# Altium PCB PIXHACK_V5_IMU_V16.PcbDoc
Units mm, origin at the board's own origin, x right, y up, seen from the top; angles counter-clockwise.
Board outline 17 x 17 mm, 4 copper layers (Top Layer, Signal Layer 1, Signal Layer 2, Bottom Layer), stack 0.951 mm thick; 36 components, 40 nets, 166 pads, 80 vias.
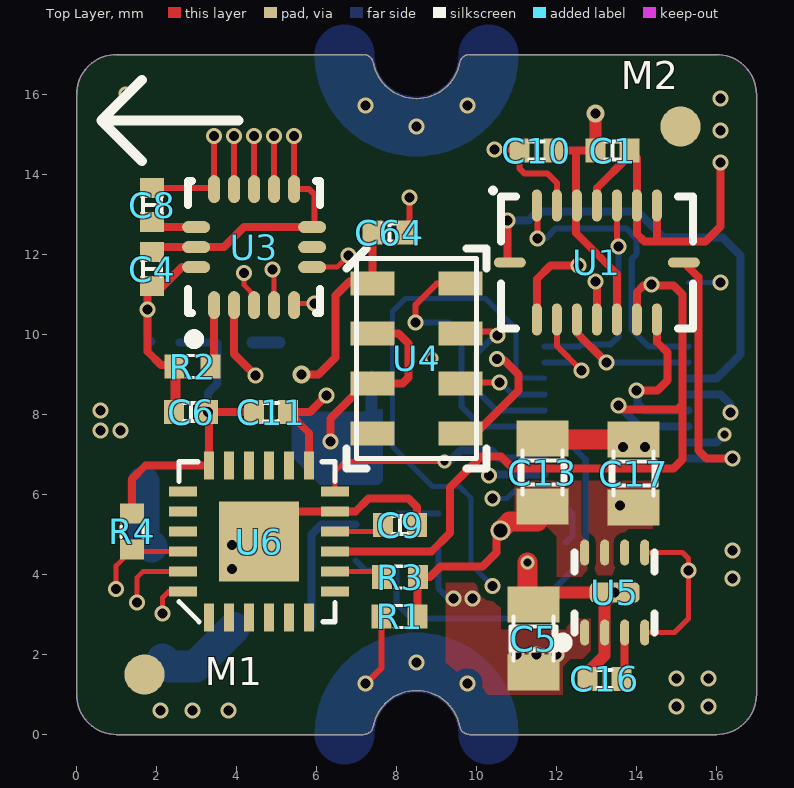
[diagram p0: Top Layer view]
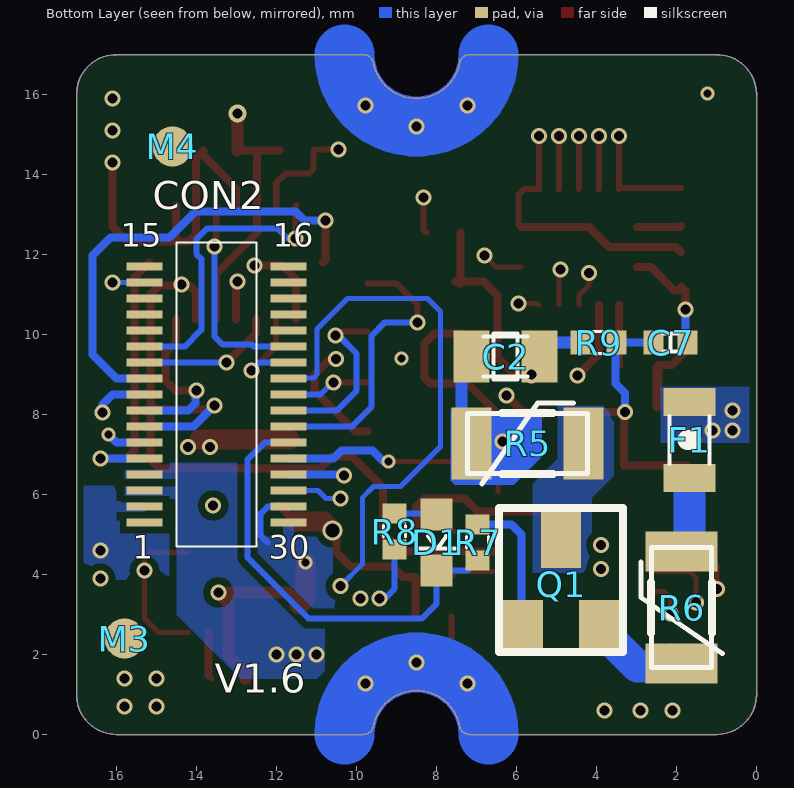
[diagram p1: Bottom Layer view, seen from below]
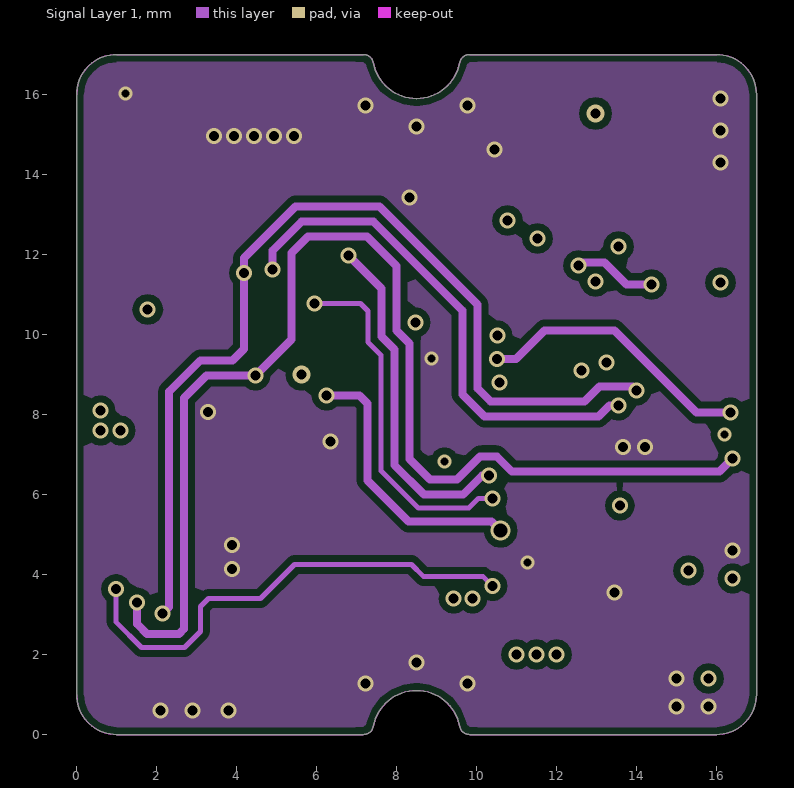
[diagram p2: Signal Layer 1]
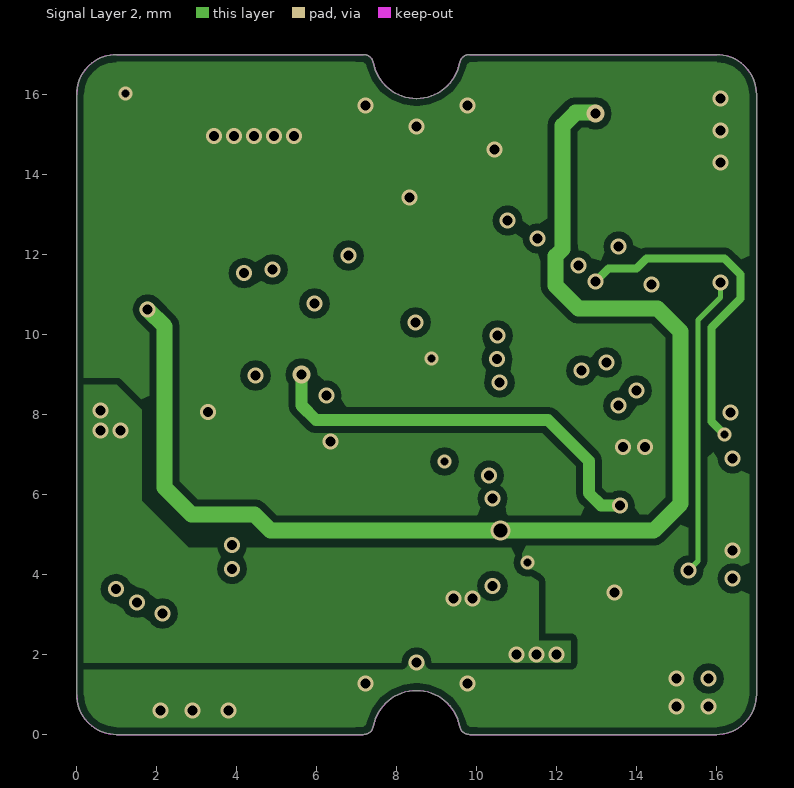
[diagram p3: Signal Layer 2]
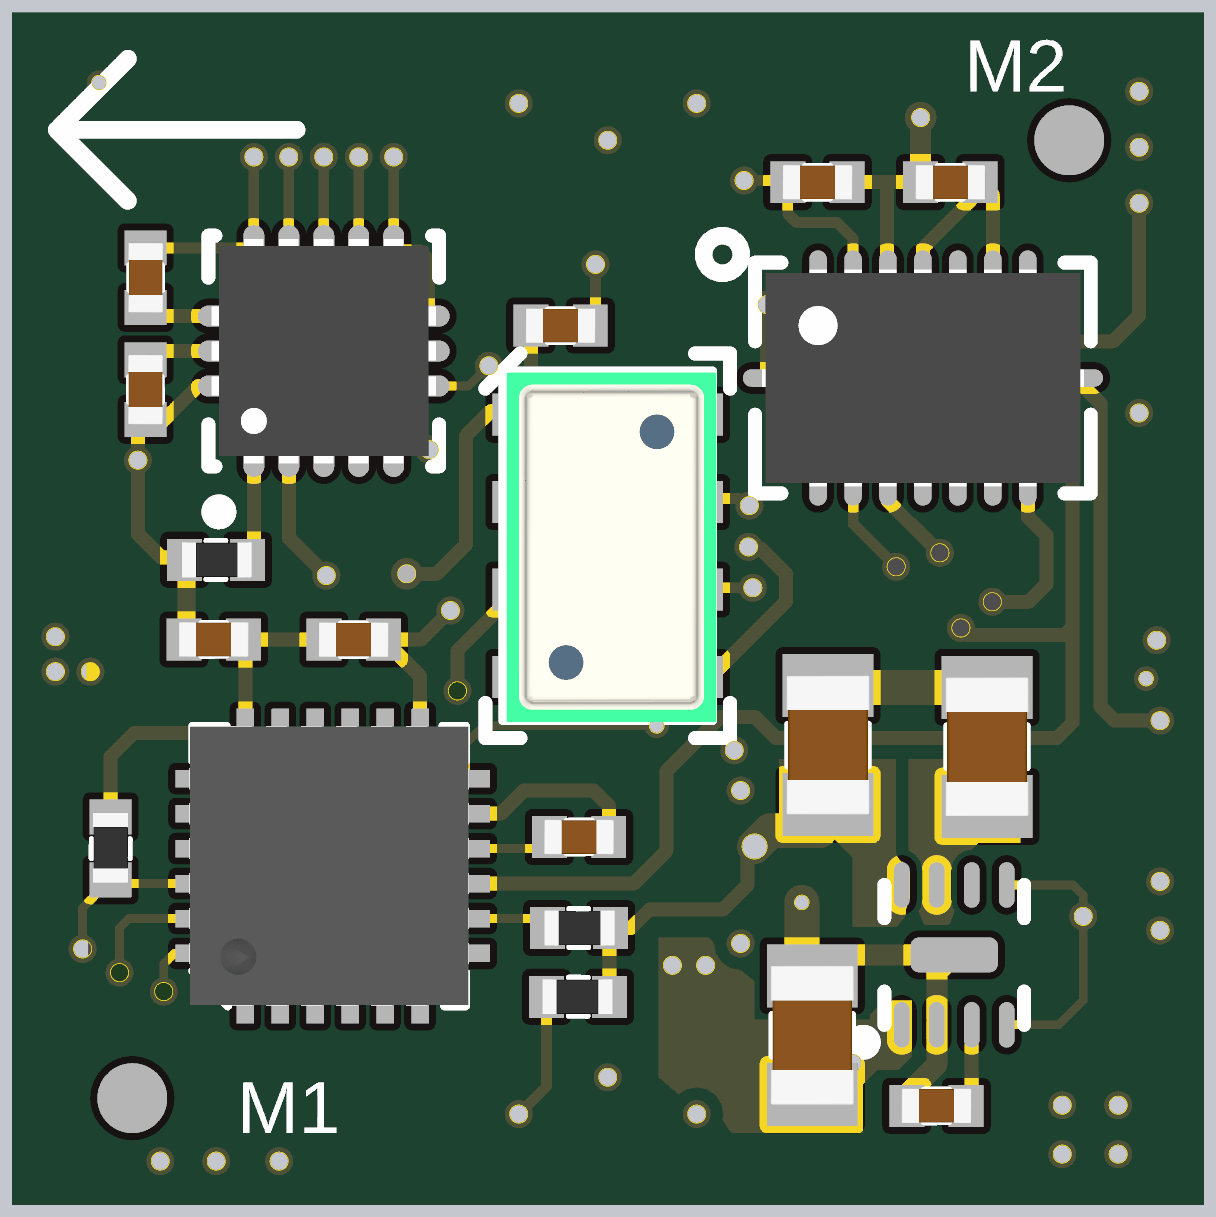
[diagram p4: 3D render of the assembled board from above, using the file's embedded part models]
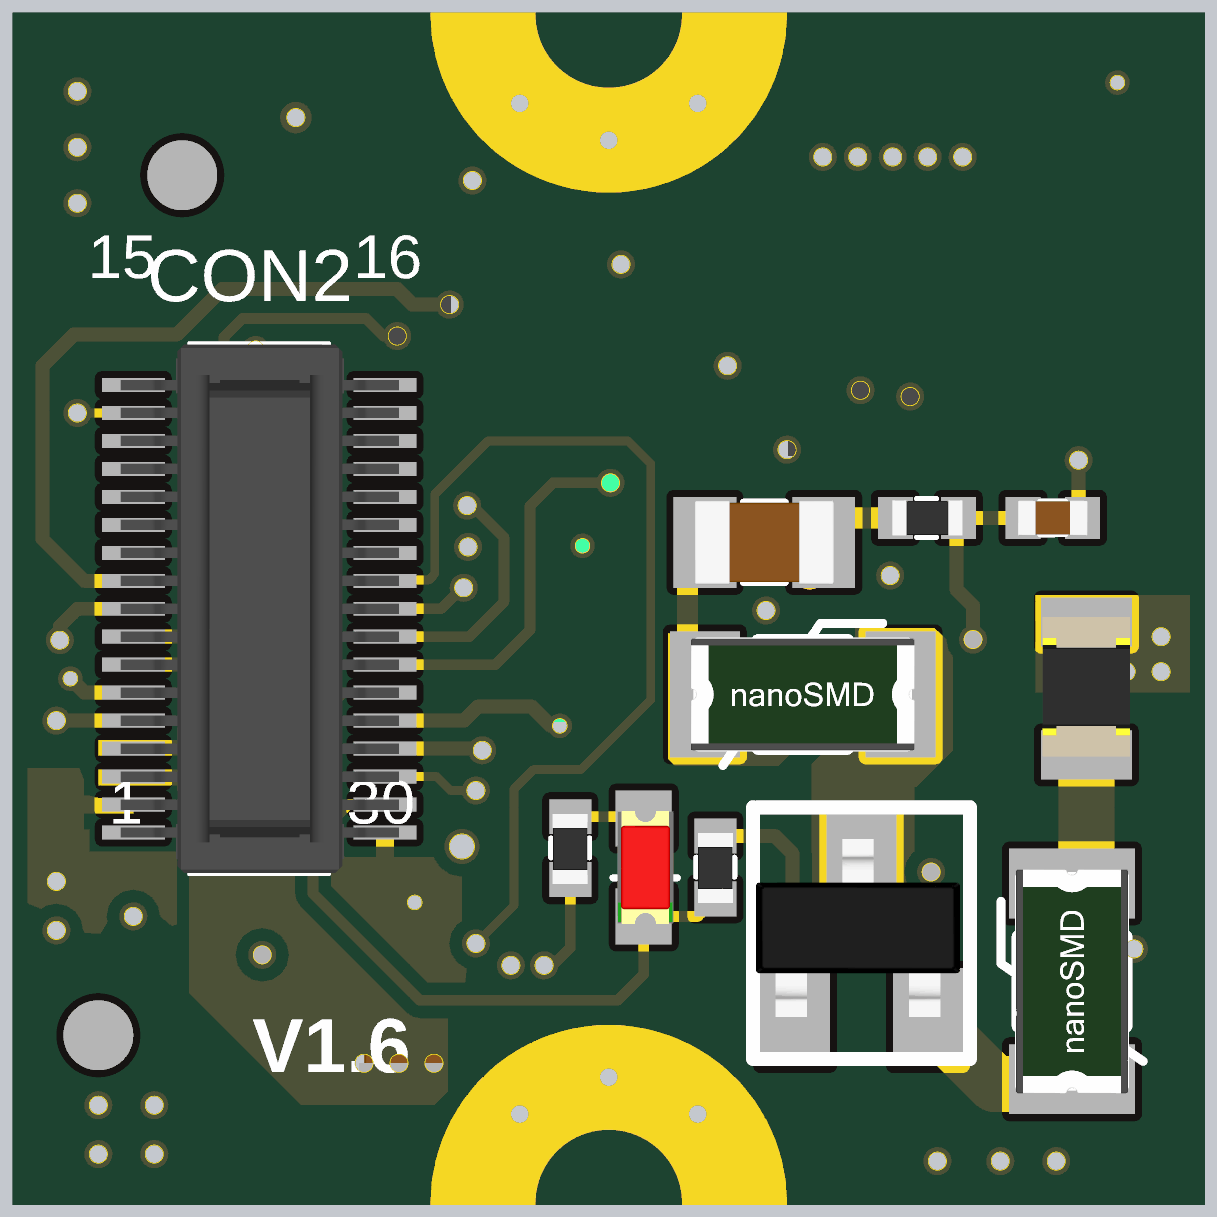
[diagram p5: 3D render of the assembled board from below, using the file's embedded part models]

## Layer stack, top to bottom
Top Solder: solder mask 0.0102, Solder Resist, Dk 3.5
Top Layer: signal copper 0.0356
Dielectric 1: core 0.254, FR-4, Dk 4.2
Signal Layer 1: signal copper 0.036
Dielectric 3: prepreg 0.3, Dk 4.2
Signal Layer 2: signal copper 0.036
Dielectric 2: core 0.254, Dk 4.2
Bottom Layer: signal copper 0.0356
Bottom Solder: solder mask 0.0102, Solder Resist, Dk 3.5

## Board outline
1,0 7.173,0 ccw(c7.173,0.25) 7.419,0.204 cw(c8.5,0) 9.581,0.204 ccw(c9.827,0.25) 9.827,0 16,0 ccw(c16,1) 17,1 17,16 ccw(c16,16) 16,17 9.827,17 ccw(c9.827,16.75) 9.581,16.796 cw(c8.5,17) 7.419,16.796 ccw(c7.173,16.75) 7.173,17 1,17 ccw(c1,16) 0,16 0,1 ccw(c1,1)

## Design rules (kind name [scope] priority, off if disabled: settings)
Clearance [All] p1: gap=0.175
PlaneConnect [All] p1: planeconnectstyle=Direct reliefexpansion=0.508 reliefentries=4 reliefconductorwidth=0.254 reliefairgap=0.254
PolygonConnect [InNet('IMU1_3V3')+InNet('IMU2_3V3')+InNet('VDD_5V_IN_IMU')+InNet('VCC')        +InNet('NetQ1_3')    +OnMultiLayer] p1: connectstyle=Direct reliefconductorwidth=0.254 reliefentries=4 polygonreliefangle="90 Angle" airgapwidth=0.254
PolygonConnect PolygonConnect_1 [All] p2: connectstyle=Relief reliefconductorwidth=0.254 reliefentries=4 polygonreliefangle="90 Angle" airgapwidth=0.254
RoomDefinition 04_POWER_LDO [InComponentClass('04_POWER_LDO')] p1: confinementstyle=ConfineIn formatcopy=TRUE lockcomponents=FALSE outline 18.155,28.315 39.364,28.315 39.364,33.268 18.155,33.268
RoomDefinition 03_constant_temp [InComponentClass('03_constant_temp')] p2: confinementstyle=ConfineIn formatcopy=TRUE lockcomponents=FALSE outline 18.155,21.203 39.491,21.203 39.491,26.918 18.155,26.918
RoomDefinition 02_IMU [InComponentClass('02_IMU')] p3: confinementstyle=ConfineIn formatcopy=TRUE lockcomponents=FALSE outline 18.155,13.71 82.544,13.71 82.544,20.06 18.155,20.06
RoomDefinition 01_interface [InComponentClass('01_interface')] p4: confinementstyle=ConfineIn formatcopy=TRUE lockcomponents=FALSE outline 18.155,1.518 24.251,1.518 24.251,12.44 18.155,12.44
RoutingVias [All] p1: holewidth=0.711 width=1.27 viastyle="Through Hole" minholewidth=0.711 minwidth=1.27 maxholewidth=0.711 maxwidth=1.27
SolderMaskExpansion [All] p1: expansion=0.102
Width [All] p1: maxlimit=1 minlimit=0.1 preferedwidth=0.125 minimp=50.000000 maximp=50.000000 favimp=50.000000
29 further rules are at their usual default settings.

## Classes and differential pairs
component class 01_interface: CON2 M1 M2 M3 M4
component class 02_IMU: C1 C2 C4 C6 C7 C8 C9 C10 C11 C64 R2 R3 R4 U1 U3 U4 U6
component class 03_constant_temp: D1 F1 Q1 R5 R6 R7 R8
component class 04_POWER_LDO: C5 C13 C16 C17 R1 R9 U5

## Components (designator, comment, footprint, x,y, rotation, side; value= is the part's Value field where it differs from the comment)
C1 "100NF" 0402C 13.4,14.6 r180 top
C2 "47uf/16V" 0805CAP 6.275,9.425 r0 bottom
C4 "100NF" 0402C 1.89,11.635 r90 top
C5 "47uf/16V" 0805CAP 11.4,2.4 r90 top
C6 "0402C220NF" 0402C 2.865,8.06 r0 top
C7 "0402C2.2UF" 0402C 2.15,9.8 r0 bottom
C8 "100NF" 0402C 1.89,13.235 r270 top
C9 "470NF" 0402C 8.09,5.235 r0 top
C10 "0402C220NF" 0402C 11.5,14.6 r180 top
C11 "0402C2.2UF" 0402C 4.865,8.06 r180 top
C13 "47uf/16V" 0805CAP 11.625,6.55 r90 top
C16 "100NF" 0402CAP 13.202,1.391 r180 top
C17 "47uf/16V" 0805CAP 13.9,6.525 r90 top
C64 "0402C100NF" 0402C 7.825,12.55 r180 top
CON2 "DF18D-30DP-0.4V(51)" "DF18C - 30DS-0.4V" 13.5,8.5 r270 bottom locked
D1 "0603_LED_RED" 0603-LED-RED 8,4.8 r270 bottom
F1 "10R" 0805L 1.645,7.36 r90 bottom
M1 "MARK" MARK 1.7,1.5 r0 top
M2 "MARK" MARK 15.1,15.2 r0 top
M3 "MARK" MARK 15.8,2.4 r180 bottom
M4 "MARK" MARK 14.6,14.7 r180 bottom
Q1 "MMBT3906" SOT-23 5.836,2.661 r180 bottom
R1 "4.7K" 0402R 8.075,2.95 r0 top
R2 "0402R0R" 0402R 2.9,9.2 r180 top
R3 "0402R0R" 0402R 8.09,3.935 r180 top
R4 "10K" 0402R 1.391,5.074 r270 top
R5 "47R" 1206F 5.725,7.3 r180 bottom
R6 "10R" 1206F 1.899,3.171 r90 bottom
R7 "10K" 0402r 6.975,4.8 r90 bottom
R8 "2K" 0402R 9.05,5.075 r90 bottom
R9 "4.7K" 0402R 3.95,9.8 r0 bottom
U1 "BMI055" LGA16_BMI055 13,11.8 r0 top
U3 "ICM-20602" LGA16 4.439,12.186 r90 top
U4 "ms5611" ms5611 8.525,9.35 r90 top
U5 "MIC5330-SSYML" MIC5530 13.456,3.55 r90 top
U6 "ICM-20689" QFN24 4.566,4.82 r90 top

## Footprints (in the part's own frame and the unit in brackets; to place one, negate y for a bottom-side part, rotate by r counter-clockwise, add the part's x,y. Pads: shape width x height; smd on the part's side, far side on the other; paste and mask are expansions set on the pad)
0402C [mm]
  rect 0.5x0.6 smd: 1(-0.425,0) 2(0.425,0)
  silkscreen extent -0.18,-0.23 0.17,0.23, body extent -0.5,-0.25 0.5,0.25, height 0.5
0402CAP [mm]
  rect 0.5x0.6 smd: 1(-0.425,0) 2(0.425,0)
  silkscreen extent -0.18,-0.23 0.17,0.23, body extent -0.5,-0.25 0.5,0.25, height 0.5
0402R [mm]
  rect 0.5x0.6 smd: 1(-0.45,0) 2(0.45,0)
  silkscreen extent -0.13,-0.27 0.14,0.28, body extent -0.51,-0.25 0.49,0.25, height 0.3
0402r [mm]
  rect 0.5x0.6 smd: 1(-0.45,0) 2(0.45,0)
  silkscreen extent -0.13,-0.27 0.14,0.28, body extent -0.51,-0.25 0.49,0.25, height 0.3
0603-LED-RED [mm]
  rect 0.8x0.8 smd: 1(-0.7,0) 2(0.7,0)
  silkscreen extent -0.16,-0.44 0.15,0.48, body extent -0.81,-0.37 0.81,0.43, height 0.6
0805CAP [mm]
  rect 0.9x1.3 smd: 1(-0.85,-0.025) 2(0.85,-0.025)
  silkscreen extent -0.55,-0.6 0.55,0.55, body extent -1,-0.62 1,0.58, height 1.2
0805L [mm]
  rect 0.7x1.3 smd: 1(-0.95,0.025) 2(0.95,0.025)
  silkscreen extent -0.6,-0.47 0.6,0.53, body extent -0.97,-0.6 1.03,0.65, height 0.45
1206F [mm]
  rect 1x1.8 smd: 1(-1.4,-0.025) 2(1.4,-0.025)
  silkscreen extent -1.5,-1.04 1.5,0.99, body extent -1.6,-0.83 1.6,0.77, height 1
"DF18C - 30DS-0.4V" [mm]
  rect 0.2x0.9 smd: 0(-3.2,-1.8) 0(-3.2,1.8) 0(3.2,-1.8) 1(2.8,-1.8) 2(2.4,-1.8) 3(2,-1.8) 4(1.6,-1.8) 5(1.2,-1.8) 6(0.8,-1.8) 7(0.4,-1.8) 8(0,-1.8) 9(-0.4,-1.8) 10(-0.8,-1.8) 11(-1.2,-1.8) 12(-1.6,-1.8) 13(-2,-1.8) 14(-2.4,-1.8) 15(-2.8,-1.8) 16(-2.8,1.8) 17(-2.4,1.8) 18(-2,1.8) 19(-1.6,1.8) 20(-1.2,1.8) 21(-0.8,1.8) 22(-0.4,1.8) 23(0,1.8) 24(0.4,1.8) 25(0.8,1.8) 26(1.2,1.8) 27(1.6,1.8) 28(2,1.8) 29(2.4,1.8) 30(2.8,1.8) 30(3.2,1.8) 30(3.2,1.8)
  silkscreen extent -3.8,-1 3.8,1, body extent -3.78,-1.98 3.78,2, height 1.16
LGA16 [mm]
  oval 0.7x0.3 smd: 1(-1.45,1) 2(-1.45,0.5) 3(-1.45,0) 4(-1.45,-0.5) 5(-1.45,-1) 9(1.45,-1) 10(1.45,-0.5) 11(1.45,0) 12(1.45,0.5) 13(1.45,1)
  oval 0.3x0.7 smd: 6(-0.5,-1.45) 7(0,-1.45) 8(0.5,-1.45) 14(0.5,1.45) 15(0,1.45) 16(-0.5,1.45)
  silkscreen extent -2.42,-1.65 1.65,1.65, body extent -1.61,-1.61 1.61,1.61, height 0.75
LGA16_BMI055 [mm]
  oval 0.25x0.8 smd: 1(-1.492,1.425) 2(-0.992,1.425) 3(-0.492,1.425) 4(0.008,1.425) 5(0.508,1.425) 6(1.008,1.425) 7(1.508,1.425) 9(1.508,-1.425) 10(1.008,-1.425) 11(0.508,-1.425) 12(0.008,-1.425) 13(-0.492,-1.425) 14(-0.992,-1.425) 15(-1.492,-1.425)
  oval 0.8x0.25 smd: 8(2.183,0) 16(-2.167,0)
  silkscreen extent -2.59,-1.65 2.41,1.8, body extent -2.29,-1.55 2.31,1.55, height 0.75
MARK [mm]
  round 1 smd: 1(0,0)
MIC5530 [mm] "QFN, 8-Leads, Body 2.0x2.0mm (max), Pitch 0.00mm, Pitch1 0.50mm, IPC Medium Density"
  oval 0.65x0.225 smd: 1(-1,0.75) 2(-1,0.25) 3(-1,-0.25) 4(-1,-0.75) 5(1,-0.75) 6(1,-0.25) 7(1,0.25) 8(1,0.75)
  rrect50% 0.5x1.25 smd: 2(0,0)
  silkscreen extent -1.37,-1 1,1.42, body extent -1,-1 1,1, height 0.85
ms5611 [mm]
  rect 0.6x1.1 smd: 1(1.925,1.125) 2(0.675,1.125) 3(-0.575,1.125) 4(-1.825,1.125) 5(-1.825,-1.075) 6(-0.575,-1.075) 7(0.675,-1.075) 8(1.925,-1.075)
  silkscreen extent -2.7,-1.73 2.8,1.77, body extent -2.47,-1.53 2.53,1.47, height 1
QFN24 [mm]
  rect 0.7x0.25 smd: 1(-1.9,1.25) 2(-1.9,0.75) 3(-1.9,0.25) 4(-1.9,-0.25) 5(-1.9,-0.75) 6(-1.9,-1.25) 13(1.9,-1.25) 14(1.9,-0.75) 15(1.9,-0.25) 16(1.9,0.25) 17(1.9,0.75) 18(1.9,1.25)
  rect 0.25x0.7 smd: 7(-1.25,-1.9) 8(-0.75,-1.9) 9(-0.25,-1.9) 10(0.25,-1.9) 11(0.75,-1.9) 12(1.25,-1.9) 19(1.25,1.9) 20(0.75,1.9) 21(0.25,1.9) 22(-0.25,1.9) 23(-0.75,1.9) 24(-1.25,1.9)
  rect 2x2 smd: 18(0,0)
  silkscreen extent -2,-1.9 2,2, body extent -2,-1.95 2,2.05, height 1
SOT-23 [mm]
  rect 1x1.4 smd: 1(0,0) 2(1.9,0) 3(0.95,2.2)
  silkscreen extent -0.6,-0.6 2.5,3, body extent -0.56,0 2.36,2.55, height 0.99

## Part data
C1 C4 C8: library part 0402C220NF
C2 C5 C13 C17: library part Cap, "Capacitor"
C9: library part 0402C2.2UF
C16: library part Cap
C64: "50V 5%"
F1: library part "Fuse 1", "Fuse"
R1 R9: library part 0402R1K, "0402R1K 1%"
R2 R3: "0402R0R 1%"
R4: library part 0402R0R, "0402R0R 1%"
R5 R6: library part Res2, "Resistor"
R7: library part RMCF0402FT4K99, "RES TF 4.99K OHM 1% 1/16W 0402"
R8: library part 0402R100R, "0402R100R 1%"
U5: library part MIC5530

## Via types
v1: diameter 0.4, hole 0.25, Top Layer to Bottom Layer, tented both sides, 72 vias
v2: diameter 0.35, hole 0.2, Top Layer to Bottom Layer, tented both sides, 5 vias
v3: diameter 0.45, hole 0.25, Top Layer to Bottom Layer, tented both sides, 2 vias
v4: diameter 0.5, hole 0.35, Top Layer to Bottom Layer, tented both sides, 1 vias

## Nets (pads, with @x,y where several pads share a name; then routed paths per layer and width w, separated by ;. In a path a pad name is that pad's centre, name@x,y a point inside that pad or via, vN(x,y) a via of type N, cw(c..) or ccw(c..) an arc to the next point about the centre after c; other vN are vias at no path point)
20689_VDDIO: R3.2 U6.8 | length 1.2
  Top Layer w0.125: U6.8 7.505,4.07 R3.2
CS1_ICM20689: CON2.22 R4.2 U6.22 | length 28.1
  Top Layer w0.125: v1(0.99,3.635) 0.99,4.223 R4.2 1.444,4.57 U6.22
  Signal Layer 1 w0.125: v1(0.99,3.635) 0.99,2.81 1.625,2.175 2.7,2.175 3.1,2.575 3.1,3.2 3.3,3.4 4.6,3.4 5.45,4.25 8.375,4.25 8.671,3.954 10.159,3.954 v1(10.4,3.713)
  Bottom Layer w0.125: v1(10.4,3.713) 9.857,4.257 9.857,5.918 9.575,6.2 8.9,6.2 7.9,7.2 7.9,10.575 8.225,10.9 10.225,10.9 10.988,10.137 10.988,9.006 11.013,8.981 11.013,8.971 11.071,8.912 11.688,8.912 CON2.22
CS2_ICM20602: CON2.29 U3.5 | length 10.7
  Top Layer w0.125: U3.5 5.478,10.775 v1(5.95,10.775)
  Signal Layer 1 w0.125: v1(5.95,10.775) 7.1,10.775 7.288,10.587 7.288,9.809 7.612,9.484 7.612,6.593 8.543,5.663 9.807,5.663 10.044,5.9 v1(10.4,5.9)
  Bottom Layer w0.125: v1(10.4,5.9) 10.762,5.9 10.963,6.1 CON2.29
CS3_BMI055_GYRO: CON2.20 U1.5 | length 5.2
  Top Layer w0.154: U1.5 13.508,12.242 v1(13.55,12.2)
  Bottom Layer w0.154: CON2.20 12.573,9.7 12.625,9.752 13.352,9.752 13.55,9.95 v1(13.55,12.2)
CS4_BMI055_ACC: CON2.21 U1.14 | length 2.6
  Top Layer w0.15: U1.14 12.008,9.717 v1(12.625,9.1) v1@12.675,9.1
  Bottom Layer w0.15: CON2.21 12.425,9.3 v1(12.625,9.1)
DRDY1_ICM20689: CON2.27 U6.12 | length 6
  Top Layer w0.125: U6.12 6.466,6.566 6.725,6.825 v2(9.2,6.825)
  Bottom Layer w0.2: v2(9.2,6.825) 9.325,6.825 9.6,7.1 10.372,7.1 10.572,6.9 CON2.27
DRDY2_BMI055_GYRO: CON2.5 U1.12 | length 10.4
  Top Layer w0.2: v1(12.975,11.325) 13.008,11.292 U1.12
  Signal Layer 2 w0.2: v1(12.975,11.325) 13.3,11.65 14,11.65 14.25,11.9 16.2,11.9 16.6,11.5 16.6,10.9 15.875,10.175 15.875,7.825 v2(16.2,7.5)
  Bottom Layer w0.2: CON2.5 16,7.3 v2(16.2,7.5)
DRDY3_BMI055_ACC: CON2.9 U1.16 | length 11.5
  Top Layer w0.2: v1(10.775,12.85) 10.775,11.858 U1.16
  Bottom Layer w0.2: v1(10.775,12.85) 11.303,12.85 11.528,13.075 14.025,13.075 14.675,12.425 16.15,12.425 16.6,11.975 16.6,9.5 16,8.9 CON2.9
DRDY4_ICM20602: CON2.28 U3.6 | length 11
  Top Layer w0.125: U3.6 6.511,11.686 v1(6.8,11.975)
  Signal Layer 1 w0.2: v1(6.8,11.975) 7.625,11.15 7.625,9.948 7.95,9.624 7.95,6.733 8.683,6 9.667,6 v1@10.142,6.475 ; v1@10.143,6.475 v1(10.309,6.475)
  Bottom Layer w0.2: v1(10.309,6.475) 10.307,6.475 10.301,6.482 10.309,6.491 10.3,6.5 CON2.28
DRDY5_BMI055_GYRO: CON2.10 U1.13 | length 3.4
  Top Layer w0.2: U1.13 12.508,10.042 12.608,9.942 12.608,9.934 12.842,9.7 12.85,9.7 v1(13.25,9.3)
  Bottom Layer w0.154: v1(13.25,9.3) CON2.10
DRDY6_BMI055_ACC: CON2.11 U1.1 | length 7.4
  Top Layer w0.154: U1.1 11.525,13.208 v1(11.525,12.4)
  Bottom Layer w0.154: v1(11.525,12.4) 11.725,12.4 11.977,12.652 13.737,12.652 14.002,12.387 14.002,12.013 13.879,11.89 13.879,10.121 14.3,9.7 CON2.11
GND: C1.1 C2.2 C4.2 C5.2 C6.2 C7.2 C8.1 C9.2 C10.2 C11.2 C13.2 C16.2 C17.2 C64.1 CON2.1 CON2.30 R1.1 R4.1 R5.1 R9.1 U1.2 U1.4 U1.6 U1.7 U3.8 U3.9 U3.10 U3.11 U3.12 U3.13 U3.15 U4.2 U4.3 U5.2 U6.11 U6.18 | length 68.2
  Top Layer w0.154: C8.1 3.415,13.66 U3.13 v1(3.439,14.961) v1@3.425,14.975 ; v1@3.925,14.975 v1(3.939,14.961) U3.12 ; v1@4.425,14.975 v1(4.439,14.961) U3.11 ; v1@4.925,14.975 v1(4.939,14.961) U3.10 ; v1@5.425,14.975 v1(5.439,14.961) U3.9 5.814,13.636 5.95,13.5 5.95,12.747 U3.8 ; v1(7.227,1.273) 7.625,1.671 R1.1 ; C64.1 8.325,12.625 v1(8.325,13.425) ; v1@10.525,14.625 11.05,14.625 C10.2 11.075,14.15 11.2,14.025 11.775,14.025 12.008,13.792 U1.2
  Top Layer w0.2: R4.1 1.391,6.391 1.72,6.72 3.316,6.72 3.316,8.058 3.315,8.06 C11.2 C11.2@4.465,8.06 ; C4.2 2.016,12.186 U3.15 3.686,12.186 4.186,12.686 U3.8 ; U6.18@4.566,4.82 5.316,5.57 U6.11 6.97,5.57 7.3,5.9 8.3,5.9 8.515,5.685 C9.2 ; v1(6.35,7.325) 6.35,7.903 7.222,8.775 U4.3 8.15,8.775 8.3,8.925 8.3,9.775 8.05,10.025 U4.2 ; C13.2 C13.2@11.675,7.375 ; U1.4 13.008,13.658 13.825,14.475 C1.1 14.008,14.417 U1.6 14.008,12.517 14.2,12.325 14.475,12.325 ; U1.7 14.508,12.358 14.475,12.325 ; v1(16.1,14.3) 16.1,12.7 15.725,12.325 14.475,12.325
  Top Layer w0.3: C5.2 11.725,3.55 v1(13.456,3.55) 13.206,3.3 13.206,2.55 13.206,1.979 12.777,1.55 C16.2
  Top Layer w0.5: v2(11.275,4.3) 11.275,3.4 C5.2 ; C13.2@11.675,7.375 C17.2
  Bottom Layer w0.154: CON2.30@11.7,5.7 12.225,5.7 12.4,5.525 12.4,4.975 12.225,4.8
  Bottom Layer w0.2: C7.2 R9.1 3.525,9.775 3.525,8.775 3.29,8.54 v1(3.29,8.06)
  Bottom Layer w0.3: R5.1@7.375,7.575 C2.2@7.375,8.95
  Bottom Layer w1.5: 6.7,0 cw(c8.5,0) 10.3,0 ; 6.7,17 ccw(c8.5,17) 10.3,17
  other v1: 2.1,0.6 2.9,0.6 3.8,0.6 15,0.7 15.8,0.7 9.773,1.273 15,1.4 8.5,1.8 3.89,4.135 16.4,4.6 3.89,4.735 13.665,7.185 14.215,7.185 10.45,14.625 16.1,15.1 8.5,15.2 7.227,15.727 9.773,15.727 16.1,15.9
  other v2: 8.875,9.4 1.225,16.025
GPIO_SPI5_MISO: CON2.18
GPIO_SPI5_MOSI: CON2.19
GPIO_SPI5_SCK: CON2.17
IMU1_3V3: C1.2 C4.1 C6.1 C7.1 C10.1 C11.1 C13.1 R1.2 R2.2 R3.1 U1.3 U1.11 U3.16 U5.8 U6.13 | length 58.3
  Top Layer w0.2: C4.1@1.88,11.2 1.9,11.18 C4.1@1.9,11.1 ; R2.2@2.44,9.235 2.115,9.235 1.78,9.57 v1(1.78,10.625) 1.78,11.1 C4.1@1.9,11.1 ; U3.16 2.641,11.686 2.055,11.1 C4.1@1.9,11.1 ; U6.13 5.816,7.533 C11.1 5.835,8.06 v1(6.25,8.475) ; R1.2@8.525,3 8.525,3.92 R3.1 8.835,3.935 9.1,4.2 10.15,4.2 10.5,4.55 v4@10.5,5 ; C13.1@11.53,5.325 C13.1@11.932,5.726 ; C10.1 12.5,14.6 ; U1.3 U1.3@12.492,13.225 ; C1.2@12.875,14.6 12.5,14.6 ; U1.11 13.508,11.517 12.492,12.533 U1.3@12.492,13.225 ; U1.3@12.492,13.225 12.492,14.592 12.5,14.6
  Top Layer w0.254: R2.2 2.475,9.175 C6.1@2.475,8.2
  Top Layer w0.3: C1.2 v3(12.975,15.525)
  Top Layer w0.5: v4(10.6,5.1) 10.825,5.325 C13.1@11.53,5.325
  Signal Layer 1 w0.2: v1(6.25,8.475) 7.075,8.475 7.275,8.275 7.275,6.35 8.3,5.325 10.375,5.325 v4(10.6,5.1)
  Signal Layer 2 w0.4: v1(1.78,10.625) 2.2,10.205 2.2,6.175 2.875,5.5 4.45,5.5 4.85,5.1 v4(10.6,5.1) 14.425,5.1 15.1,5.775 15.1,10.075 14.525,10.65 12.55,10.65 11.975,11.225 11.975,11.963 12.15,12.138 12.15,15.225 12.475,15.55 12.95,15.55 v3(12.975,15.525)
  Bottom Layer w0.2: v1(1.78,10.625) 1.78,9.92 1.875,9.825 C7.1@1.85,9.8
IMU2_3V3: C2.1 C17.1 C64.2 R9.2 U4.1 U5.7 | length 16
  Top Layer w0.2: v3(5.625,9) 6.05,9 6.475,9.425 6.475,10.975 6.825,11.325 U4.1@7.4,11.325 ; U4.1@7.4,11.275 U4.1@7.4,11.325 ; C64.2 U4.1@7.4,11.325 ; U4.1@7.525,11.325 U4.1@7.4,11.325
  Signal Layer 2 w0.3: v3(5.625,9) 5.625,8.225 5.983,7.867 11.783,7.867 12.808,6.842 12.808,6.032 13.114,5.726 v1(13.583,5.726)
  Bottom Layer w0.3: R9.2 C2.1@5.075,9.8
IMU_HEATER: CON2.26 D1.2 R7.1 | length 11.1
  Bottom Layer w0.154: R7.1 7.225,4.1 D1.2 8,3.275 8.375,2.9 11.2,2.9 12.729,4.429 12.729,6.871 12.3,7.3 CON2.26
NetC8_2: C8.2 U3.14 | length 1.1
  Top Layer w0.2: C8.2@1.89,12.71 1.914,12.686 U3.14
NetC9_1: C9.1 U6.10 | length 1.2
  Top Layer w0.125: U6.10 7.63,5.07 C9.1@7.665,5.035
NetC16_1: C16.1 U5.3 | length 1.2
  Top Layer w0.125: C16.1 C16.1@13.706,1.47
  Top Layer w0.2: C16.1@13.706,1.47 U5.3
NetD1_1: D1.1 R8.2 | length 1.1
  Bottom Layer w0.154: D1.1 8.025,5.525 R8.2
NetQ1_1: Q1.1 R7.2 | length 3.6
  Bottom Layer w0.2: Q1.1 5.875,2.7 5.875,5 6.125,5.25 R7.2
NetQ1_2: Q1.2 R6.1 | length 2.3
  Bottom Layer w0.8: R6.1@2.15,1.875 2.325,1.7 2.975,1.7 Q1.2
NetQ1_3: Q1.3 R5.2
NetR2_1: R2.1 U3.1 | length 1.5
  Top Layer w0.125: R2.1@3.44,9.235 R2.1@3.439,9.236
  Top Layer w0.2: R2.1@3.439,9.236 U3.1
SPI1_MISO: CON2.6 U1.10 U1.15 U3.4 U6.9 | length 38.3
  Top Layer w0.125: v1(4.9,11.625) 4.939,11.586 U3.4
  Top Layer w0.2: U6.9 8.87,4.57 9.337,5.037 9.337,6.175 10.112,6.95 10.264,6.95 10.611,6.95 10.911,6.65 14.925,6.65 15.15,6.875 15.15,8.25 ; U1.15 11.508,11.383 11.85,11.725 v1(12.55,11.725) ; v1(13.551,8.225) 13.651,8.125 15.025,8.125 15.15,8.25 ; U1.10 14.008,11.058 14.175,11.225 14.925,11.225 15.15,11 15.15,8.25
  Signal Layer 1 w0.2: v1(4.9,11.625) 4.9,12.095 5.63,12.825 7.42,12.825 9.65,10.595 9.65,8.5 10.2,7.95 13.05,7.95 13.325,8.225 v1(13.551,8.225) ; v1(12.55,11.725) 12.625,11.8 13.2,11.8 13.75,11.25 v1(14.375,11.25)
  Bottom Layer w0.2: v1(13.551,8.225) 14.076,7.7 CON2.6
SPI1_MOSI: CON2.7 U1.9 U3.3 U6.24 | length 30.1
  Top Layer w0.125: v1(2.15,3.025) 2.15,3.42 2.3,3.57 U6.24 ; v1(4.19,11.535) 4.19,11.235 4.439,10.986 U3.3
  Top Layer w0.2: v1(14,8.6) 14.525,8.6 14.775,8.85 14.775,9.55 14.508,9.817 U1.9
  Signal Layer 1 w0.2: v1(2.15,3.025) 2.315,3.19 2.315,8.57 3.095,9.35 3.9,9.35 4.19,9.64 v1(4.19,11.535) 4.19,11.915 5.475,13.2 7.575,13.2 10.025,10.75 10.025,8.655 10.355,8.325 12.7,8.325 13.075,8.7 13.9,8.7 v1(14,8.6)
  Signal Layer 2 w0.2: v1(14,8.6) v1@14.026,8.574
  Bottom Layer w0.2: v1(14,8.6) 14.026,8.574 14.026,8.422 14.026,8.281 14.206,8.1 CON2.7
SPI1_SCK: CON2.4 U1.8 U3.2 U6.23 | length 40.7
  Top Layer w0.125: v1(1.518,3.296) 1.518,3.931 1.657,4.07 U6.23
  Top Layer w0.2: U3.2 3.939,9.511 v1(4.475,8.975) ; U1.8 15.55,11.433 15.55,7.1 15.75,6.9 v1(16.4,6.9)
  Signal Layer 1 w0.2: v1(1.518,3.296) 1.518,2.76 1.765,2.512 2.56,2.512 2.69,2.642 2.69,8.415 3.25,8.975 v1(4.475,8.975) 5.375,9.875 5.375,12.039 5.786,12.45 7.264,12.45 8,11.714 8,10.104 8.325,9.779 8.325,6.889 8.839,6.375 9.511,6.375 10.086,6.95 10.112,6.95 10.506,6.95 10.881,6.575 16.075,6.575 v1(16.4,6.9)
  Bottom Layer w0.2: CON2.4 v1(16.4,6.9)
SPI4_CS1_MS5611: CON2.8 U4.5 | length 11
  Top Layer w0.2: U4.5@9.725,7.575 10.022,7.575 11.05,8.603 11.05,8.997 v1@10.687,9.359
  Signal Layer 1 w0.2: v1(10.513,9.384) 10.984,9.384 11.7,10.1 13.45,10.1 15.5,8.05 v1(16.351,8.05)
  Bottom Layer w0.2: CON2.8 16.1,8.5 16.351,8.249 v1(16.351,8.05)
SPI4_CS2: CON2.16
SPI4_MISO: CON2.23 U4.6 | length 2.1
  Top Layer w0.15: U4.6@9.725,8.825 9.75,8.8 v1(10.575,8.8)
  Bottom Layer w0.15: v1@10.6,8.8 10.9,8.5 CON2.23
SPI4_MOSI: CON2.24 U4.7 | length 4.6
  Top Layer w0.154: U4.7@9.725,10.075 10.375,10.075 10.5,9.95 v1@10.551,9.95
  Bottom Layer w0.154: 10.4,8.2 10.5,8.1 ; v1@10.551,9.95 10.425,9.95 10,9.525 10,8.6 10.5,8.1 ; CON2.24 10.5,8.1
  other v1: 10.526,9.975
SPI4_SCK: CON2.25 U4.8 | length 7.3
  Top Layer w0.154: v1(8.475,10.301) 8.475,10.75 9,11.275 U4.8@9.725,11.275
  Bottom Layer w0.154: v1(8.475,10.301) 9.299,10.301 9.625,9.975 9.625,8.2 10.125,7.7 CON2.25
SPI5_CS1_EX1: CON2.12
SPI5_CS2_EX1: CON2.13
SPI5_CS3_EX1: CON2.14
TEMP_VCC: F1.1 R6.2 | length 1.8
  Bottom Layer w0.8: R6.2@1.67,4.8 F1.1@1.67,6.31 ; R6.2@1.67,4.9 R6.2@1.874,4.696
VDD_3V3_SENSORS_EN: CON2.15 U5.4 U5.5 | length 12.2
  Top Layer w0.125: U5.4 14.95,2.55 15.3,2.9 v1(15.3,4.1) 15.3,4.4 15.15,4.55 U5.5
  Signal Layer 2 w0.125: v1(15.3,4.1) 15.538,4.338 15.538,10.363 16.1,10.925 v1(16.1,11.3)
  Bottom Layer w0.125: CON2.15 v1(16.1,11.3)
VDD_5V_IN_IMU: C5.1 CON2.2 CON2.3 F1.2 R8.1 U5.1 | length 1.5
  Bottom Layer w0.154: R8.1 9.05,3.65 9.3,3.4 v1(9.425,3.4)
  other v1: 11,2 11.5,2 12,2 9.9,3.4 0.6,7.6 1.1,7.6 0.6,8.1
pads on no net: CON2.0 M1.1 M2.1 M3.1 M4.1 U3.7 U4.4 U5.6 U6.1 U6.2 U6.3 U6.4 U6.5 U6.6 U6.7 U6.14 U6.15 U6.16 U6.17 U6.19 U6.20 U6.21
copper on no net:
  other v1: 15.8,1.4 16.4,3.9

## Polygon pours and split planes (outlines as drawn)
IMU2_3V3 on Top Layer "NONET_L-01_P-001" (solid, remove dead copper, pour order 2): 13,3.95 13.5,3.95 13.5,4.85 13.7,5.05 13.8,5.15 14.4,5.15 14.4,6.35 12.8,6.35 12.8,4.05 12.9,3.95
VDD_5V_IN_IMU on Top Layer "NONET_L-01_P-001" (solid, remove dead copper, pour order 12): 12.85,2.9 12.85,2.1 12.75,2 12.65,1.9 12.35,1.9 12.25,1.8 12.15,1.7 12.15,1 10.15,1 10.05,1.1 9.225,1.8 9.225,3.8 10.45,3.8 10.55,3.7 10.65,3.6 10.65,2.7 12.25,2.7 12.45,2.9
IMU1_3V3 on Top Layer "NONET_L-01_P-001" (solid, remove dead copper, pour order 4): 10.95,6.35 12.9,6.35 12.9,3.95 12,3.95 12,4.95 11.8,5.15 11.7,5.25 10.95,5.25
VDD_5V_IN_IMU on Bottom Layer "NONET_L-01_P-001" (solid, remove dead copper, pour order 6): 2.4,8.6 2.4,7.3 0,7.3 0,8.7 2.4,8.7
VDD_5V_IN_IMU on Bottom Layer "NONET_L-01_P-001" (solid, remove dead copper, pour order 48): 10.8,2.9 10.8,1.6 11,1.4 12.8,1.4 12.9,1.4 13.4,1.9 14.5,3 14.5,5.9 15.8,5.9 15.8,6.2 14.5,6.2 14.5,6.4 15.8,6.4 15.8,6.8 13,6.8 12.9,6.7 12.9,4.4 11.4,2.9
NetQ1_3 on Bottom Layer "NONET_L-01_P-001" (solid, remove dead copper, pour order 74): 3.75,8.225 4.975,8.225 4.975,6.9 5.15,6.725 5.6,6.275 5.6,4.05 4.175,4.05 4.125,4.1 4.125,5.95 4.1,5.95 3.65,6.4 3.575,6.475 3.575,8.225
GND on Bottom Layer "NONET_L-01_P-001" (solid, remove dead copper, pour order 80): 14.5,6.2 14.525,6.225 17.025,6.225 17.025,3.925 16.95,3.85 16.92,3.82 14.5,3.82
GND on Bottom Layer "NONET_L-01_P-001" (solid, remove dead copper, pour order 82): 10.963,6.1 12.7,6.1 12.7,4.4 12.7,4.375 11.45,3.125 11.225,2.9 10.5,2.9 10.5,3.613 10.4,3.713 10.6,3.913 10.6,5.1
VDD_5V_IN_IMU on Signal Layer 2 "NONET_L-01_P-001" (solid, remove dead copper, pour order 38): 0,8.74 0,1.8 11.125,1.8 12.353,1.8 12.353,2.35 11.55,2.35 11.55,2.75 11.55,4.675 2.8,4.675 2.05,5.425 1.625,5.85 1.625,8.025 1.625,8.125 1.01,8.74
GND on Signal Layer 2 "NONET_L-01_P-001" (solid, remove dead copper, pour order 78): -0.025,17.175 16.6,17.175 16.95,16.825 17.05,16.725 17.05,0.05 0.175,0.05 -0.15,-0.275
GND on Signal Layer 1 "NONET_L-01_P-001" (solid, remove dead copper, pour order 76): -0.025,17.175 16.6,17.175 16.95,16.825 17.05,16.725 17.05,0.05 0.175,0.05 -0.15,-0.275

## Keep-outs
Keep-Out Layer:
  lines w0.013: 0,1 ccw(c1,1) 1,0 7.173,0 ccw(c7.173,0.25) 7.419,0.204 cw(c8.5,0) 9.581,0.204 ccw(c9.827,0.25) 9.827,0 16,0 ccw(c16,1) 17,1 17,16 ccw(c16,16) 16,17 9.827,17 ccw(c9.827,16.75) 9.581,16.796 cw(c8.5,17) 7.419,16.796 ccw(c7.173,16.75) 7.173,17 1,17 ccw(c1,16) 0,16 0,1

## Other copper
Bottom Layer:
  region net GND: 7.65,8.15 7.65,6.35 7.55,6.25 6.075,6.25 5.375,6.95 5.375,8.075 7.075,8.075

## Silkscreen, mask and mechanical layers (free items; w line width, h text height)
Top Overlay:
  lines w0.254: 1.637,14.334 0.621,15.35 ; 1.637,16.366 0.621,15.35 ; 4.05,15.35 0.621,15.35
Bottom Overlay:
  text "16" at 12.1,12 h1
  text "15" at 15.9,12 h1
  text "30" at 12.2,4.2 h1
  text "1" at 15.6,4.2 h1
  text "V1.6" at 13.55,0.8 h1.25
Bottom Solder:
  lines w1.5: 6.7,0 cw(c8.5,0) 10.3,0 ; 6.7,17 ccw(c8.5,17) 10.3,17